# EAGLE board print (EAGLE 5.12), part 1 of 3
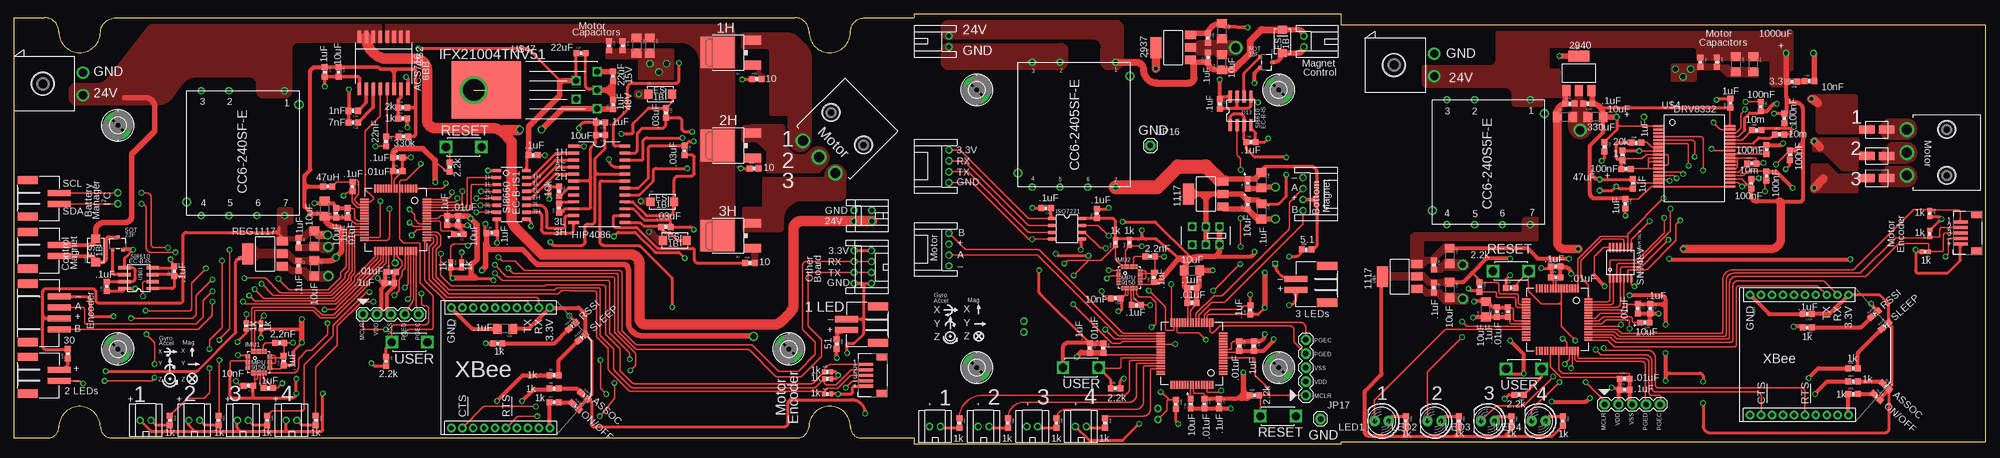
[diagram p0: board, top side]
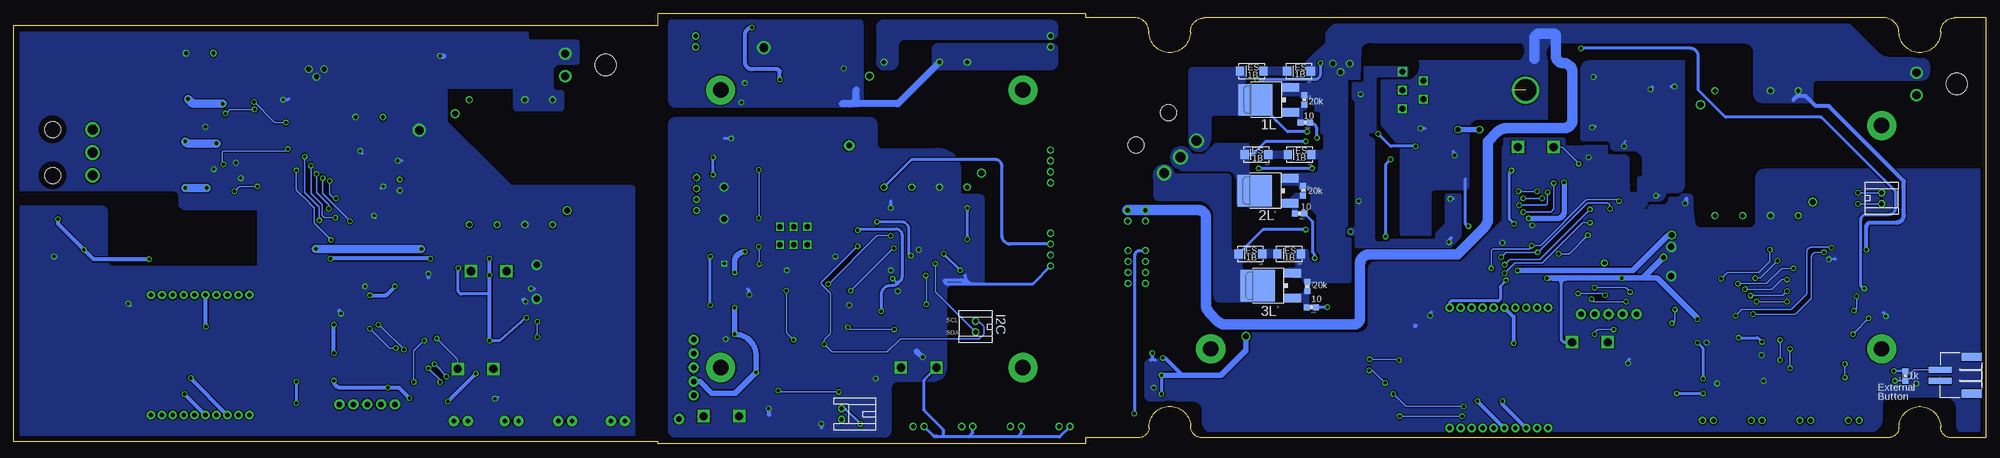
[diagram p1: board, bottom side, seen from below]

Size 360.62 x 78.74 mm. Coordinates in mm from the lower left corner, seen from the top.
Outline: 0,77.97 5.71,77.97 arc-90 8.25,75.43 arc180 15.88,75.43 arc-90 18.8,77.97 142.87,77.97 arc-90 145.42,75.43 arc180 153.04,75.43 arc-90 155.58,77.97 160.78,77.97 164.66,77.97 164.66,78.74 242.76,78.74 242.76,76.58 360.62,76.58 360.62,0.38 242.76,0.38 242.76,0 164.66,0 164.66,1.13 160.78,1.13 154.94,1.13 arc-90 153.04,3.04 arc182 145.42,3.04 arc-90 143.13,1.13 17.91,1.13 arc-90 15.88,3.04 arc180 8.25,3.04 arc-90 6.35,1.13 0,1.13 0,77.97
Copper layers (1*16): Top 0.035mm / dielectric 1.5mm / Bottom 0.035mm
Design rules "default": minimum track width 10mil, minimum drill 24mil, track to track 8mil, track to pad 8mil, pad to pad 8mil, via to via 8mil, smd to smd 8mil, copper to edge 40mil, drill to drill 8mil, minimum pad ring 10mil, minimum via ring 8mil, stop-mask expansion 4mil, vias tented up to drill 0mil, thermal gap 10mil

## Footprints (pad centres in the part's own frame; a part is rotated, then mirrored left to right if it is on the bottom)
DPAK = smd 5.791 x 6.274: D 0,1.587 | smd 1.6 x 3: G -2.286,-4.851; S 2.286,-4.851
JST-2-PH-SMD = smd 1.1 x 4.2: 1 -1,-7.7; 2 1,-7.7 | smd 1.5 x 3.7: P$1 -3.35,-1.95; P$4 3.35,-1.95
0603-POL = smd 1.1 x 1: + 0.85,0; - -0.85,0
0603 = smd 1.1 x 1.1: 1 -0.85,0; 2 0.85,0
1206 = smd 1.6 x 1.8: 1 -1.4,0; 2 1.4,0
SOIC16-W = smd 0.65 x 2.25: 1 -4.445,-4.75; 2 -3.175,-4.75; 3 -1.905,-4.75; 4 -0.635,-4.75; 5 0.635,-4.75; 6 1.905,-4.75; 7 3.175,-4.75; 8 4.445,-4.75; 9 4.445,4.75; 10 3.175,4.75; 11 1.905,4.75; 12 0.635,4.75; 13 -0.635,4.75; 14 -1.905,4.75; 15 -3.175,4.75; 16 -4.445,4.75
SMA-DIODE = smd 1.52 x 1.63: A -2.15,0; C 2.15,0
SOIC8-N = smd 2.2 x 0.6: 1 -2.6,1.905; 2 -2.6,0.635; 3 -2.6,-0.635; 4 -2.6,-1.905; 5 2.6,-1.905; 6 2.6,-0.635; 7 2.6,0.635; 8 2.6,1.905
SOIC-8 = smd 1.5 x 0.55: 1 -2.7,1.905; 2 -2.7,0.635; 3 -2.7,-0.635; 4 -2.7,-1.905; 5 2.7,-1.905; 6 2.7,-0.635; 7 2.7,0.635; 8 2.7,1.905
2,8-PAD = drill 2.8 pad 5.334 round: B2,8 0,0
LGA24_4X4 = smd 0.8 x 0.35: 1 -2,1.25; 2 -2,0.75; 3 -2,0.25; 4 -2,-0.25; 5 -2,-0.75; 6 -2,-1.25; 13 2,-1.25; 14 2,-0.75; 15 2,-0.25; 16 2,0.25; 17 2,0.75; 18 2,1.25 | smd 0.35 x 0.85: 7 -1.25,-1.975; 8 -0.75,-1.975; 9 -0.25,-1.975; 10 0.25,-1.975; 11 0.75,-1.975; 12 1.25,-1.975; 19 1.25,1.975; 20 0.75,1.975; 21 0.25,1.975; 22 -0.25,1.975; 23 -0.75,1.975; 24 -1.25,1.975
JST-4-PH-SMD = smd 1.1 x 4.2: 1 -3,-7.7; 2 -1,-7.7; 3 1,-7.7; 4 3,-7.7 | smd 1.5 x 3.7: P$1 -5.35,-1.95; P$2 5.35,-1.95
JST-5-SH = smd 0.6 x 2.7: 1 2,4; 2 1,4; 3 0,4; 4 -1,4; 5 -2,4 | smd 1.2 x 2: P$6 -3.3,1; P$7 3.3,1
JST-2-PH-TH = drill 0.8 round: 1 -1,-6.35; 2 1,-6.35
1X01_TEST = drill 0.762 round: 1 0,0
JST-2-PH-V = drill 0.8 round: 1 -1,0; 2 1,0
JST-4-PH-TH = drill 0.8 round: 1 -3,-6.35; 2 -1,-6.35; 3 1,-6.35; 4 3,-6.35
JST-4-PH-V = drill 0.8 round: 1 -3,0; 2 -1,0; 3 1,0; 4 3,0
TE-MINIMATENLOK-2 = drill 1.48 round: 1 -2.07,12.67; 2 2.07,12.67 | hole 3.91: 0,5.33
MOLEX-3-MINIFITJR-RA = drill 1.803 round: 1 4.191,13.538; 2 0,13.538; 3 -4.191,13.538 | hole 3: -4.204,6.248; 4.204,6.248
1X01 = drill 1.016 pad 1.88 round: 1 0,0
1X05-PICKIT3 = drill 1.016 pad 1.88 round: MCLR 1.27,-1.016; PGEC 11.43,-1.016; PGED 8.89,-1.016; VDD 3.81,-1.016; VSS 6.35,-1.016
LED5MM = drill 0.813 pad 1.88 round: A -1.27,0; K 1.27,0
SOT23F = smd 0.6 x 0.65: D 0,1.125; G -0.95,-1.125; S 0.95,-1.125
SOIC24-W = smd 0.533 x 1.981: 1 -6.985,-4.686; 2 -5.715,-4.686; 3 -4.445,-4.686; 4 -3.175,-4.686; 5 -1.905,-4.686; 6 -0.635,-4.686; 7 0.635,-4.686; 8 1.905,-4.686; 9 3.175,-4.686; 10 4.445,-4.686; 11 5.715,-4.686; 12 6.985,-4.686; 13 6.985,4.686; 14 5.715,4.686; 15 4.445,4.686; 16 3.175,4.686; 17 1.905,4.686; 18 0.635,4.686; 19 -0.635,4.686; 20 -1.905,4.686; 21 -3.175,4.686; 22 -4.445,4.686; 23 -5.715,4.686; 24 -6.985,4.686
SOT223 = smd 1.499 x 2.007: 1 -2.261,-3.15; 2 0.025,-3.15; 3 2.311,-3.15 | smd 3.81 x 2.007: 4 0,3.15
CC6-2405SF-E = drill 0.8 round: 1 -11.43,7.62; 2 -11.43,-2.54; 3 -11.43,-7.62; 4 11.43,-7.62; 5 11.43,-2.54; 6 11.43,2.54; 7 11.43,7.62 | drill 1.1 round: P$9 8.89,-10.25; P$10 -8.89,10.25
0402 = smd 0.7 x 0.9: 1 -0.65,0; 2 0.65,0
TACTILE_SWITCH = drill 1.5 square: 1 -3.25,0; 2 3.25,0
SLIDE_SWITCH = drill 1 square: 1 -2.489,1.651; 2 0,1.651; 3 2.489,1.651; 4 2.489,-1.651; 5 0,-1.651; 6 -2.489,-1.651
TQFP64_10X10 = smd 1.5 x 0.3: 1 -5.7,3.75; 2 -5.7,3.25; 3 -5.7,2.75; 4 -5.7,2.25; 5 -5.7,1.75; 6 -5.7,1.25; 7 -5.7,0.75; 8 -5.7,0.25; 9 -5.7,-0.25; 10 -5.7,-0.75; 11 -5.7,-1.25; 12 -5.7,-1.75; 13 -5.7,-2.25; 14 -5.7,-2.75; 15 -5.7,-3.25; 16 -5.7,-3.75; 33 5.7,-3.75; 34 5.7,-3.25; 35 5.7,-2.75; 36 5.7,-2.25; 37 5.7,-1.75; 38 5.7,-1.25; 39 5.7,-0.75; 40 5.7,-0.25; 41 5.7,0.25; 42 5.7,0.75; 43 5.7,1.25; 44 5.7,1.75; 45 5.7,2.25; 46 5.7,2.75; 47 5.7,3.25; 48 5.7,3.75 | smd 0.3 x 1.5: 17 -3.75,-5.7; 18 -3.25,-5.7; 19 -2.75,-5.7; 20 -2.25,-5.7; 21 -1.75,-5.7; 22 -1.25,-5.7; 23 -0.75,-5.7; 24 -0.25,-5.7; 25 0.25,-5.7; 26 0.75,-5.7; 27 1.25,-5.7; 28 1.75,-5.7; 29 2.25,-5.7; 30 2.75,-5.7; 31 3.25,-5.7; 32 3.75,-5.7; 49 3.75,5.7; 50 3.25,5.7; 51 2.75,5.7; 52 2.25,5.7; 53 1.75,5.7; 54 1.25,5.7; 55 0.75,5.7; 56 0.25,5.7; 57 -0.25,5.7; 58 -0.75,5.7; 59 -1.25,5.7; 60 -1.75,5.7; 61 -2.25,5.7; 62 -2.75,5.7; 63 -3.25,5.7; 64 -3.75,5.7
36HSSOP = smd 2 x 0.4: 1 -6.5,5.85; 2 -6.5,5.2; 3 -6.5,4.55; 4 -6.5,3.9; 5 -6.5,3.25; 6 -6.5,2.6; 7 -6.5,1.95; 8 -6.5,1.3; 9 -6.5,0.65; 10 -6.5,0; 11 -6.5,-0.65; 12 -6.5,-1.3; 13 -6.5,-1.95; 14 -6.5,-2.6; 15 -6.5,-3.25; 16 -6.5,-3.9; 17 -6.5,-4.55; 18 -6.5,-5.2; 19 6.5,-5.2; 20 6.5,-4.52; 21 6.5,-3.87; 22 6.5,-3.22; 23 6.5,-2.57; 24 6.5,-1.92; 25 6.5,-1.27; 26 6.5,-0.62; 27 6.5,0.03; 28 6.5,0.68; 29 6.5,1.33; 30 6.5,1.98; 31 6.5,2.63; 32 6.5,3.28; 33 6.5,3.93; 34 6.5,4.58; 35 6.5,5.23; 36 6.5,5.85
2-SMD(J-LEAD) = smd 2.77 x 1.47: P$1 -1.79,0; P$2 1.79,0
RADIAL-10 = drill 0.7 round: P$1 0,2.5; P$2 0,-2.5
RADIAL-5 = drill 0.6 round: P$1 0,1; P$2 0,-1
14TSSOP = smd 1.6 x 0.35: 1 -2.8,1.95; 2 -2.8,1.3; 3 -2.8,0.65; 4 -2.8,0; 5 -2.8,-0.65; 6 -2.8,-1.3; 7 -2.8,-1.95; 8 2.8,-1.95; 9 2.8,-1.3; 10 2.8,-0.65; 11 2.8,0; 12 2.8,0.65; 13 2.8,1.3; 14 2.8,1.95
SOIC16-N = smd 0.6 x 1.55: 1 -4.445,-2.7; 2 -3.175,-2.7; 3 -1.905,-2.7; 4 -0.635,-2.7; 5 0.635,-2.7; 6 1.905,-2.7; 7 3.175,-2.7; 8 4.445,-2.7; 9 4.445,2.7; 10 3.175,2.7; 11 1.905,2.7; 12 0.635,2.7; 13 -0.635,2.7; 14 -1.905,2.7; 15 -3.175,2.7; 16 -4.445,2.7
TO220-5 = drill 1.1 square: 1 3.81,-3.404; 2 0,-1.702; 3 3.81,0; 4 0,1.702; 5 3.81,3.404 | smd 12.7 x 10.541: PAD -16.434,0 | drill 3.937 round: PAD2 -18.72,0
XBEE-SILK = drill 0.8 pad 1.524 round: 1 -11,20; 2 -11,18; 3 -11,16; 4 -11,14; 5 -11,12; 6 -11,10; 7 -11,8; 8 -11,6; 9 -11,4; 10 -11,2; 11 11,2; 12 11,4; 13 11,6; 14 11,8; 15 11,10; 16 11,12; 17 11,14; 18 11,16; 19 11,18; 20 11,20
0603-DIODE = smd 1.1 x 1.1: AN -0.85,0; CAT 0.85,0

## Placement (x,y rotation side)
1H  IRLR024  [DPAK]  130.3,71.62 90 top
1L  IRLR024  [DPAK]  131.95,62.98 90 bottom
2H  IRLR024  [DPAK]  130.3,54.6 90 top
2L  IRLR024  [DPAK]  132.08,46.34 90 bottom
3H  IRLR024  [DPAK]  130.3,38.09 90 top
3L  IRLR024  [DPAK]  131.57,28.94 90 bottom
BUTTON  [JST-2-PH-SMD]  0.64,12.56 270 bottom
C1  10uF  [0603-POL]  81.41,38.34 180 top
C2  .1uF  [0603]  61.98,47.1 270 top
C3  .1uF  [0603]  52.07,32.63 270 top
C4  10uF  [1206]  54.99,32.12 270 top
C5  10uF  [1206]  54.99,37.58 270 top
C6  .1uF  [0603]  52.07,36.82 270 top
C7  .01uF  [0603]  69.09,31.48 0 top
C8  .01uF  [0603]  61.09,42.28 90 top
C9  .01uF  [0603]  81.28,40.88 270 top
C10  .01uF  [0603]  70.23,49.9 0 top
C11  .1uF  [0603]  70.23,52.44 0 top
C12  .1uF  [0603]  79.25,40.88 270 top
C13  .1uF  [0603]  58.93,42.28 90 top
C14  .1uF  [0603]  68.73,29.45 0 top
C15  10uF  [1206]  56.9,43.04 90 top
C16  .1uF  [0603]  49.4,15.23 90 top
C17  2.2nF  [0603]  48.64,18.53 0 top
C18  10nF  [0603]  42.94,10.66 180 top
C19  .1uF  [0603]  46.57,10.24 0 top
C20  .1uF  [1206]  89.87,21.07 180 top
C21  1nF  [0603]  62.1,60.95 180 top
C22  7nF  [0603]  62.1,58.79 180 top
C23  22nF  [0603]  68.07,55.36 270 top
C24  .1uF  [0603]  56.9,68.06 270 top
C25  10uF  [0603]  59.44,68.06 270 top
C26  .1uF 48V  [0603]  109.6,62.09 90 top
C27  22uF  [0603]  103.76,71.49 0 top
C28  22uF 15V  [0603]  109.6,67.3 270 top
C29  .1uF  [0603]  95,52.82 0 top
C30  .1uF  [0603]  87.38,38.6 0 top
C31  DNI  [0603]  99.69,43.17 90 top
C32  .03uF 15V  [0603]  119.25,60.57 270 top
C33  .03uF 15V  [0603]  122.68,53.71 270 top
C34  .03uF 15V  [0603]  119.25,39.74 180 top
C35  .1uF  [0603]  107.31,58.79 180 top
C36  10uF  [0603]  107.31,56.5 180 top
C37  .1uF  [0603]  29.34,31.61 90 top
C38  .1uF  [0603]  17.02,28.82 90 top
C39  .01uF  [0603]  108.84,72.89 270 top
C40  .1uF  [0603]  111.38,72.89 270 top
C41  1uF  [1206]  113.92,72.89 270 top
C42  10uF  [1206]  116.33,72.89 270 top
C43  .1uF  [0603]  226.76,17.91 270 top
C44  10uF  [0603-POL]  215.2,7.37 90 top
C45  .1uF  [1206]  228.16,48.26 270 top
C46  10uF  [0603-POL]  225.62,47.62 90 top
C47  10uF  [0603-POL]  225.62,43.81 90 top
C48  .1uF  [1206]  228.16,42.55 270 top
C49  .1uF  [0603]  226.12,24.51 90 top
C50  .1uF  [0603]  220.41,7.37 270 top
C51  .1uF  [0603]  196.79,17.53 270 top
C52  .1uF  [0603]  215.46,28.58 0 top
C53  .01uF  [0603]  215.44,25.84 0 top
C54  .01uF  [0603]  224.09,17.91 270 top
C55  .01uF  [0603]  217.74,7.37 270 top
C56  .01uF  [0603]  199.25,17.53 270 top
C57  10uF  [1206]  215.46,31.75 0 top
C58  10nF  [0603]  201.49,26.67 180 top
C59  .1uF  [0603]  205.3,25.4 0 top
C60  .1uF  [0603]  208.47,30.48 90 top
C61  2.2nF  [0603]  207.84,34.29 0 top
C62  .1uF 24V  [0603]  218.38,70.74 90 top
C63  .1uF 24V  [0603]  218.38,74.3 270 top
C64  10uF 24V  [1206]  220.92,69.85 90 top
C65  10uF 24V  [1206]  220.92,75.57 270 top
C66  .1uF  [0603]  226.25,55.24 0 top
C67  .1uF  [0603]  220.54,62.23 270 top
C68  .1uF  [0603]  188.79,43.18 180 top
C69  .1uF  [0603]  198.06,42.16 90 top
C70  10uF  [0603-POL]  298.26,22.23 180 top
C71  .01uF  [0603]  273.24,24.13 90 top
C72  .1uF  [0603]  294.58,9.91 0 top
C73  .1uF  [0603]  281.98,32.49 0 top
C74  .01uF  [0603]  281.98,30.45 0 top
C75  .1uF  [0603]  299.28,24.77 270 top
C76  .01uF  [0603]  296.99,24.77 270 top
C77  .01uF  [0603]  294.58,11.94 0 top
C78  10uF  [1206]  269.18,24.64 90 top
C79  1uF  [0603]  296.1,47.62 270 top
C80  1uF  [0603]  294.7,43.94 270 top
C81  1uF  [0603]  290.89,54.36 270 top
C82  1uF  [0603]  313.88,62.36 90 top
C83  100nF 24V  [0603]  317.69,47.62 90 top
C84  10nF 24V  [0603]  328.36,66.42 0 top
C85  100nF 24V  [0603]  324.8,52.83 270 top
C86  100nF 24V  [0603]  319.47,61.72 270 top
C87  100nF 24V  [0603]  320.48,53.85 90 top
C88  100nF 24V  [0603]  320.48,49.02 90 top
C89  100nF  [0603]  294.83,50.29 0 top
C90  100nF 24V  [0603]  323.79,59.56 270 top
C91  .01uF  [0603]  308.42,69.85 270 top
C92  .1uF  [0603]  311.47,69.85 270 top
C93  1uF  [1206]  314.9,69.47 270 top
C94  10uF  [1206]  318.07,69.47 270 top
C95  10uF  [1206]  262.57,34.42 270 top
C96  .1uF  [0603]  259.65,32.77 270 top
C97  .1uF  [0603]  259.65,28.58 270 top
C98  10uF  [1206]  262.57,28.19 270 top
C99  10uF 24V  [1206]  283.65,59.82 0 top
C100  .1uF 24V  [0603]  284.54,62.23 0 top
C101  .1uF 24V  [0603]  287.85,62.23 180 top
C102  10uF 24V  [1206]  289.24,59.82 180 top
C103  .1uF  [0603]  327.98,23.75 180 top
C104  .1uF  [0603]  271.21,24.13 90 top
C105  .1uF  [0603]  268.03,28.7 270 top
CS2  ACS716KLATR-6BB-T  [SOIC16-W]  67.67,69.71 180 top
D1  ES1B  [SMA-DIODE]  120.9,37.2 0 top
D2  ES1B  [SMA-DIODE]  118.62,44.31 0 top
D3  ES1B  [SMA-DIODE]  118.24,64 0 top
D4  ES1B  [SMA-DIODE]  134.24,68.19 180 bottom
D5  ES1B  [SMA-DIODE]  125.6,68.19 180 bottom
D6  ES1B  [SMA-DIODE]  134.49,34.79 180 bottom
D7  ES1B  [SMA-DIODE]  127.38,34.79 180 bottom
D8  ES1B  [SMA-DIODE]  133.35,52.95 180 bottom
D9  ES1B  [SMA-DIODE]  125.48,52.95 180 bottom
D10  ES1B  [SMA-DIODE]  14.99,35.42 90 top
D11  ES1B  [SMA-DIODE]  231.97,73.66 90 top
D13  DIGITAL-ISOLATOR-1CHSOIC8-N  [SOIC8-N]  224.35,60.96 90 top
D15  ISO7221SMD  [SOIC-8]  192.6,39.37 0 top
H1  MOUNT-PAD-ROUND2.8  [2,8-PAD]  19.05,58.28 0 top
H2  MOUNT-PAD-ROUND2.8  [2,8-PAD]  19.05,17.39 0 top
H3  MOUNT-PAD-ROUND2.8  [2,8-PAD]  141.73,17.39 0 top
H4  MOUNT-PAD-ROUND2.8  [2,8-PAD]  176.09,64.77 0 top
H5  MOUNT-PAD-ROUND2.8  [2,8-PAD]  231.33,64.77 0 top
H6  MOUNT-PAD-ROUND2.8  [2,8-PAD]  176.09,13.97 0 top
H7  MOUNT-PAD-ROUND2.8  [2,8-PAD]  231.33,13.97 0 top
IMU1  MPU-9150  [LGA24_4X4]  44.83,14.97 0 top
IMU2  MPU-9150  [LGA24_4X4]  204.03,30.48 0 top
J2  [JST-4-PH-SMD]  0.64,23.99 90 top
J5  [JST-5-SH]  159.77,12.56 90 top
J7  [JST-2-PH-TH]  160.02,41.77 270 top
JP1  M01TEST  [1X01_TEST]  69.72,33.13 0 top
JP2  [JST-2-PH-SMD]  0.64,44.95 90 top
JP3  [JST-2-PH-V]  19.05,44.95 90 bottom
JP4  [JST-4-PH-TH]  160.02,32.37 270 top
JP5  [JST-4-PH-V]  156.85,32.37 270 top
JP6  [JST-2-PH-V]  24.13,4.31 180 top
JP7  [JST-2-PH-V]  33.02,4.31 180 top
JP8  [JST-2-PH-V]  41.91,4.31 180 top
JP9  [JST-2-PH-V]  50.8,4.31 180 top
JP10  [TE-MINIMATENLOK-2]  0,65.9 270 top
JP11  [JST-2-PH-SMD]  160.02,21.83 270 top
JP12  [JST-2-PH-V]  156.92,41.77 270 top
JP13  [JST-2-PH-SMD]  0.64,12.56 90 top
JP14  [JST-2-PH-SMD]  0.64,35.42 90 top
JP15  [MOLEX-3-MINIFITJR-RA]  156.85,62.09 135 top
JP16  M01PTH  [1X01]  207.84,54.61 0 top
JP17  M01PTH  [1X01]  238.95,4.57 0 top
JP18  [JST-2-PH-SMD]  242.13,29.21 270 top
JP19  [JST-2-PH-V]  177.36,3.17 180 top
JP20  [JST-2-PH-V]  186.25,3.17 180 top
JP21  [JST-2-PH-V]  168.47,3.17 180 top
JP22  [JST-2-PH-V]  195.14,3.17 180 top
JP23  [JST-2-PH-V]  184.72,21.46 270 bottom
JP24  [JST-4-PH-TH]  164.66,35.56 90 top
JP25  [JST-4-PH-TH]  242.13,45.72 270 top
JP26  [JST-2-PH-TH]  242.25,73.66 270 top
JP27  [JST-4-PH-TH]  164.66,50.8 90 top
JP28  [JST-2-PH-TH]  164.66,73.66 90 top
JP29  [JST-2-PH-TH]  202.88,5.46 270 bottom
JP30  [1X05-PICKIT3]  289.62,8.25 0 top
JP31  [MOLEX-3-MINIFITJR-RA]  359.73,53.34 90 top
JP32  [TE-MINIMATENLOK-2]  247.08,69.34 270 top
JP33  [JST-5-SH]  359.98,38.61 90 top
L1  47uH  [0603]  57.4,47.1 0 top
LED1  [LED5MM]  250.13,4.19 180 top
LED2  [LED5MM]  259.78,4.19 180 top
LED3  [LED5MM]  269.56,4.19 180 top
LED4  [LED5MM]  278.83,4.19 180 top
M1  N-MOSSOT23F  [SOT23F]  19.05,36.69 0 top
M2  N-MOSSOT23F  [SOT23F]  229.04,69.85 270 top
MD1  HIP4086  [SOIC24-W]  107.06,47.49 270 top
P1  LINEAR-REG1117  [SOT223]  45.97,34.79 90 top
P2  DC-DC-CONVERTER1.2A  [CC6-2405SF-E]  41.91,53.2 270 top
P3  DC-DC-CONVERTER1.2A  [CC6-2405SF-E]  193.87,58.42 270 top
P4  LINEAR-REG1117  [SOT223]  218,45.72 90 top
P5  LINEAR-REGLM2937  [SOT223]  212.03,72.52 90 top
PROG  [1X05-PICKIT3]  62.61,24.75 0 top
PROG_1  [1X05-PICKIT3]  235.27,7.62 90 top
R1  1k  [0603]  14.73,12.43 90 bottom
R2  2.2k  [0603]  79.76,50.66 90 top
R3  2.2k  [0603]  68.11,15.13 270 top
R4  10k  [0402]  42.55,21.58 270 top
R5  10k  [0402]  45.21,21.58 270 top
R6  1k  [0603]  88.48,18.4 180 top
R7  1k  [0603]  98.81,7.61 0 top
R8  1k  [0603]  98.81,10.15 0 top
R9  1k  [0603]  98.82,12.57 0 top
R10  2k  [0603]  71.12,61.58 0 top
R11  1k  [0603]  71.12,59.55 0 top
R12  330k  [0603]  71.25,56.25 0 top
R13  1k  [0402]  148.84,9.13 0 top
R14  1k  [0402]  148.84,11.93 0 top
R15  1k  [0402]  148.84,13.2 0 top
R16  1k  [0402]  79.88,32.75 270 top
R17  1k  [0402]  81.92,32.75 270 top
R18  1k  [0603]  28.57,4.31 270 top
R19  1k  [0603]  37.47,4.31 270 top
R20  1k  [0603]  46.35,4.31 270 top
R21  1k  [0603]  55.24,4.31 270 top
R22  51  [0603]  150.5,18.28 270 top
R23  30  [0603]  9.91,16.5 90 top
R24  10k  [0603]  99.69,46.22 270 top
R25  10  [0603]  135.89,66.79 0 top
R26  10  [0603]  124.46,58.79 180 bottom
R27  10  [0603]  125.48,42.15 180 bottom
R28  10  [0603]  123.32,25.01 180 bottom
R29  10  [0603]  135.38,50.41 0 top
R30  10  [0603]  134.62,33.13 0 top
R31  20k  [0603]  124.59,62.98 270 bottom
R32  20k  [0603]  124.84,46.34 270 bottom
R33  20k  [0603]  124.08,28.82 270 bottom
R34  2.2k  [0603]  226.89,8.89 0 top
R35  2.2k  [0603]  201.49,10.16 0 top
R36  5.1  [0603]  236.41,35.56 0 top
R37  1k  [0603]  172.91,3.81 270 top
R38  1k  [0603]  181.8,3.81 270 top
R39  1k  [0603]  190.69,3.81 270 top
R40  1k  [0603]  199.58,3.81 270 top
R41  10k  [0402]  201.49,36.83 90 top
R42  10k  [0402]  204.03,36.83 90 top
R43  10k  [0603]  212.53,7.24 270 top
R44  2.2k  [0603]  275.27,9.02 180 top
R45  2.2k  [0603]  273.75,28.58 0 top
R46  3.3  [0603]  325.18,66.29 180 top
R47  1  [0603]  294.2,52.83 90 top
R48  20k  [0603]  296.74,55.12 0 top
R49  10 mOhm  [0603]  318.71,57.4 0 top
R50  10mOhm  [0603]  322.9,56.64 0 top
R51  10mOhm  [0603]  317.82,51.31 0 top
R52  1k  [0603]  327.98,21.34 180 top
R53  1k  [0603]  336.36,9.14 0 top
R54  1k  [0603]  336.36,11.43 0 top
R55  1k  [0603]  336.36,13.84 0 top
R56  1k  [0402]  349.57,35.18 180 top
R57  1k  [0402]  350.33,38.48 90 top
R58  1k  [0402]  350.33,42.16 270 top
R59  1k  [0603]  254.57,4.19 270 top
R60  1k  [0603]  264.22,4.19 270 top
R61  1k  [0603]  273.88,4.19 270 top
R62  1k  [0603]  283.27,4.19 270 top
RESET  TACTILE_SWITCH  [TACTILE_SWITCH]  273.75,31.62 180 top
RESET1  TACTILE_SWITCH  [TACTILE_SWITCH]  82.3,54.34 0 top
RESET2  TACTILE_SWITCH  [TACTILE_SWITCH]  231.2,5.08 0 top
SW1  SLIDE_SWTHROUGHHOLE  [SLIDE_SWITCH]  218,38.1 180 top
U$1  DSPIC33EP512MC806  [TQFP64_10X10]  69.85,41.01 270 top
U$2  DSPIC33EP512MC806  [TQFP64_10X10]  215.46,16.51 180 top
U$3  DSPIC33EP512MC806  [TQFP64_10X10]  282.26,22.73 270 top
U$4  DRV833236HSSOP  [36HSSOP]  307.28,52.32 0 top
U$5  LINEAR-REG1117  [SOT223]  253.43,30.61 90 top
U$6  LINEAR-REGLM2940  [SOT223]  286.19,67.82 0 top
U$8  DC-DC-CONVERTER1.2A  [CC6-2405SF-E]  269.68,51.56 270 top
U$10  35F0121-0SR-10  [2-SMD(J-LEAD)]  340.68,57.53 0 top
U$11  35F0121-0SR-10  [2-SMD(J-LEAD)]  340.68,52.7 0 top
U$12  35F0121-0SR-10  [2-SMD(J-LEAD)]  340.68,48.64 0 top
U$13  1000uF  [RADIAL-10]  326.58,71.5 270 top
U$14  330uF  [RADIAL-10]  295.59,59.82 270 top
U$15  47uF  [RADIAL-5]  290,47.37 180 top
U$34  SN74LV32APWR74LV  [14TSSOP]  293.81,33.15 90 top
U$46  DIGITAL-ISOLATOR-6CHSI8660EC-B-IS1  [SOIC16-N]  91.06,45.58 270 top
U$47  IFX21004TNV51  [TO220-5]  102.87,64.76 0 top
U$61  DIGITAL-ISOLATOR-1CHSOIC8-N  [SOIC8-N]  22.86,30.34 180 top
USER  TACTILE_SWITCH  [TACTILE_SWITCH]  195.14,13.97 0 top
USER1  TACTILE_SWITCH  [TACTILE_SWITCH]  72.39,18.61 180 top
USER2  TACTILE_SWITCH  [TACTILE_SWITCH]  276.16,13.72 0 top
XBEE  XBEETH  [XBEE-SILK]  78.03,13.91 270 top
XBEE1  XBEETH  [XBEE-SILK]  315.53,16.26 270 top
XLED1  [0603-DIODE]  102.73,6.9 318 top
XLED2  [0603-DIODE]  103.89,19.47 42 top
XLED3  [0603-DIODE]  104.32,8.81 318 top
XLED4  [0603-DIODE]  102.13,21.6 42 top
XLED5  [0603-DIODE]  340.68,8.64 318 top
XLED6  [0603-DIODE]  342.33,10.54 318 top
XLED7  [0603-DIODE]  342.2,21.59 42 top
XLED8  [0603-DIODE]  340.3,23.75 42 top

## Library data of the parts
1H 1L 2H 2L 3H 3L BUTTON C1-C105 CS2 D1-D11 D13 H1-H7 IMU1 IMU2 J2 J5 J7 JP1-JP33 L1 LED1-LED4 M1 M2 MD1 P1-P5 PROG PROG_1 R1-R62 RESET RESET1 RESET2 SW1 U$1-U$3 U$5 U$6 U$8 U$46 U$47 U$61 USER USER1 USER2 XBEE XBEE1 XLED1-XLED8 = GibbotV5
D15 = GibbotV6
U$4 U$10-U$15 U$34 = motordriver

## Nets
1HO: 1H.G R25.2
1HS: 1H.S 1L.D C32.2 D4.C JP15.1 MD1.23
1LO: 1L.G R26.2 R31.2
2HO: 2H.G R29.2
2HS: 2H.S 2L.D C33.1 D8.C JP15.2 MD1.18
2LO: 2L.G R27.2 R32.2
3.3V: C3.1 C4.1 C7.1 C8.1 C9.1 C10.1 C11.1 C12.1 C13.1 C14.1 C15.1 C16.1 C18.1 C20.1 C24.1 C25.1 CS2.14 IMU1.3 IMU1.8 IMU1.9 IMU1.13 JP4.1 JP5.1 JP6.2 JP7.2 JP8.2 JP9.2 L1.1 P1.2 P1.4 PROG.VDD R1.2 R2.1 R4.2 R5.2 R10.2 R12.2 R16.2 R17.2 U$1.10 U$1.26 U$1.38 U$1.57 USER1.1 XBEE.1 XLED1.CAT XLED2.CAT XLED3.CAT
3.3V1: C43.1 C49.1 C50.1 C51.1 C52.1 C53.1 C54.1 C55.1 C56.1 C57.1 C58.1 C60.1 C69.1 D15.8 IMU2.3 IMU2.8 IMU2.9 IMU2.13 JP19.2 JP20.2 JP21.2 JP22.2 JP29.1 PROG_1.VDD R34.1 R41.2 R42.2 SW1.1 SW1.6 U$2.10 U$2.19 U$2.26 U$2.38 U$2.57 USER.1
3.3V2: C71.1 C72.1 C73.1 C74.1 C75.1 C76.1 C77.1 C78.1 C97.1 C98.1 C103.1 C104.1 C105.1 JP30.VDD R45.1 R59.2 R60.2 R61.2 R62.2 U$3.10 U$3.19 U$3.26 U$3.38 U$3.57 U$5.2 U$5.4 U$34.14 USER2.1 XBEE1.1 XLED5.CAT XLED6.CAT XLED7.CAT
3HO: 3H.G R30.2
3HS: 3H.S 3L.D C34.1 D6.C JP15.3 MD1.15
3LO: 3L.G R28.2 R33.2
5V: C45.1 C46.+ JP24.3 JP25.3 P3.7 P4.3 R36.2
5V1: C27.1 C29.1 C38.1 U$46.16 U$47.4 U$61.8
5V2: C5.1 C6.1 C30.1 C37.1 J2.2 J5.5 P1.3 P2.7 R13.2 R14.2 R15.2 R22.2 R23.2 U$46.1 U$61.1 U$61.3
5V3: C95.1 C96.1 JP33.5 R56.2 R57.2 R58.2 U$5.3 U$8.7
12V: C79.1 C80.1 C81.1 C82.1 C101.1 C102.1 U$4.1 U$4.17 U$4.18 U$4.19 U$4.36 U$6.3 U$14.P$2 U$15.P$2
15V: C28.1 C35.1 C36.1 D1.A D2.A D3.A MD1.20 R24.1 U$47.5
24V: C26.1 CS2.5 CS2.6 CS2.7 CS2.8 D10.C J7.2 JP10.2 JP12.2 JP14.2 P2.1 U$47.1
24V1: C62.1 C64.1 D11.C JP26.1 JP28.2 P3.1 P5.1
24V2: C83.1 C85.1 C90.1 C91.1 C92.1 C93.1 C94.1 C99.1 C100.1 JP32.2 R46.2 U$4.21 U$4.29 U$4.34 U$6.1 U$8.1 U$13.P$2
CTS: U$1.54 XBEE.12
CTS1: U$3.54 XBEE1.12
FAULT: U$1.16
GND: C70.- C71.2 C72.2 C73.2 C74.2 C75.2 C76.2 C77.2 C78.2 C79.2 C80.2 C81.2 C82.2 C83.2 C84.2 C85.2 C90.2 C91.2 C92.2 C93.2 C94.2 C95.2 C96.2 C97.2 C98.2 C99.2 C100.2 C101.2 C102.2 C103.2 C104.2 C105.2 JP30.VSS JP32.1 JP33.4 R44.2 R47.2 R49.2 R50.2 R51.2 RESET.2 U$3.9 U$3.20 U$3.25 U$3.41 U$4.8 U$4.24 U$4.25 U$4.26 U$4.27 U$5.1 U$6.2 U$6.4 U$8.2 U$8.3 U$8.5 U$13.P$1 U$14.P$1 U$15.P$1 U$34.7 XBEE1.10 XLED8.CAT
GND1: 1L.S 2L.S 3L.S C26.2 C27.2 C28.2 C29.2 C31.1 C35.2 C36.2 C38.2 C39.2 C40.2 C41.2 C42.2 D5.A D7.A D9.A J7.1 JP10.1 JP12.1 M1.S MD1.6 MD1.10 P2.2 P2.3 R31.1 R32.1 R33.1 U$46.9 U$47.3 U$47.PAD U$47.PAD2 U$61.5 U$61.7
GND2: BUTTON.2 C1.- C2.2 C3.2 C4.2 C5.2 C6.2 C7.2 C8.2 C9.2 C10.2 C11.2 C12.2 C13.2 C14.2 C15.2 C16.2 C17.2 C18.2 C19.2 C20.2 C21.2 C22.2 C23.2 C24.2 C25.2 C30.2 C37.2 CS2.9 CS2.16 IMU1.1 IMU1.11 IMU1.15 IMU1.17 IMU1.18 J2.4 J5.4 JP4.4 JP5.4 JP11.1 JP13.1 P1.1 P2.5 PROG.VSS R3.2 R11.2 RESET1.2 U$1.9 U$1.20 U$1.25 U$1.41 U$46.8 U$61.4 XBEE.10 XLED4.CAT
GND3: C43.2 C44.- C45.2 C46.- C47.- C48.2 C49.2 C50.2 C51.2 C52.2 C53.2 C54.2 C55.2 C56.2 C57.2 C58.2 C59.2 C60.2 C61.2 C66.2 C69.2 D13.4 D15.5 IMU2.1 IMU2.11 IMU2.15 IMU2.17 IMU2.18 JP16.1 JP17.1 JP18.1 JP24.1 JP25.1 P3.5 P4.1 PROG_1.VSS R35.2 R43.2 RESET2.2 U$2.9 U$2.20 U$2.25 U$2.41
GND4: C62.2 C63.2 C64.2 C65.2 C67.2 D13.5 D13.7 JP28.1 M2.S P3.2 P3.3 P5.2 P5.4
HALL1: J5.1 R15.1 U$1.53
HALL2: J5.2 R14.1 U$1.52
HALL3: J5.3 R13.1 U$1.51
HALL4: JP33.1 R58.1 U$3.53
HALL5: JP33.2 R57.1 U$3.52
HALL6: JP33.3 R56.1 U$3.51
I_SENSE: CS2.12 U$1.18
IMU_INT1: IMU1.12 U$1.35
IMU_INT2: IMU2.12 U$2.35
LED1: R18.1 U$1.28
LED2: R19.1 U$1.27
LED3: R20.1 U$1.45
LED4: R21.1 U$1.46
LED5: R40.1 U$2.46
LED6: R39.1 U$2.45
LED7: R38.1 U$2.44
LED8: R37.1 U$2.43
LED9: LED4.K U$3.46
LED10: LED3.K U$3.45
LED11: LED2.K U$3.27
LED12: LED1.K U$3.28
LOW_MAG: D13.2 U$2.30
LOW_MAGA: JP25.2 U$2.23
LOW_MAGB: JP25.4 U$2.22
M2: C89.1 R47.1 R48.1 U$4.9 U$4.12
MCLR1: PROG.MCLR R2.2 RESET1.1 U$1.7
MCLR2: JP30.MCLR R45.2 RESET.1 U$3.7
MCLR_2: PROG_1.MCLR R34.2 RESET2.1 U$2.7
MOT_TEMP: JP29.2 R43.1 U$2.62
MOTA: JP24.2 U$2.34
MOTB: JP24.4 U$2.33
MOTOR+: 1H.D 2H.D 3H.D C39.1 C40.1 C41.1 C42.1 CS2.1 CS2.2 CS2.3 CS2.4
N$1: C47.+ C48.1 P4.2 SW1.2 SW1.5
N$2: C44.+ U$2.56
N$3: JP18.2 R36.1
N$4: C1.+ U$1.56
N$5: P4.4
N$6: C2.1 L1.2 U$1.19
N$7: JP22.1 R40.2
N$8: BUTTON.1 R1.1 U$1.30
N$9: JP1.1 U$1.40
N$10: JP20.1 R39.2
N$11: JP19.1 R38.2
N$12: JP21.1 R37.2
N$13: C59.1 IMU2.10
N$14: C61.1 IMU2.20
N$15: C63.1 C65.1 C67.1 D13.8 P5.3
N$16: C17.1 IMU1.20
N$17: D13.6 M2.G
N$18: C19.1 IMU1.10
N$19: R6.2 XBEE.6
N$20: R6.1 XLED4.AN
N$21: R7.1 XBEE.20
N$22: R7.2 XLED1.AN
N$23: R8.2 XLED3.AN
N$24: R9.2 XLED2.AN
N$25: R8.1 XBEE.15
N$26: R9.1 XBEE.13
N$27: D11.A JP26.2 M2.D
N$28: CS2.15 R10.1 R11.1
N$29: C21.1 CS2.10
N$30: C23.1 CS2.13 R12.1
N$31: C22.1 CS2.11
N$32: JP6.1 R18.2
N$33: C68.1 D15.1 JP27.4
N$34: JP7.1 R19.2
N$35: JP8.1 R20.2
N$36: JP9.1 R21.2
N$37: D15.2 JP27.3
N$38: MD1.24 R25.1
N$39: MD1.22 R26.1
N$40: MD1.21 R27.1
N$41: MD1.19 R28.1
N$42: MD1.17 R29.1
N$43: JP11.2 R22.1
N$44: JP13.2 R23.1
N$45: MD1.14 R30.1
N$46: D15.3 JP27.2
N$47: C31.2 MD1.9
N$48: MD1.7 R24.2
N$49: D4.A D5.C
N$50: D6.A D7.C
N$51: D8.A D9.C
N$52: C32.1 D3.C MD1.1
N$53: C68.2 D15.4 JP27.1
N$54: C70.+ U$3.56
N$55: C34.2 D1.C MD1.13
N$56: C33.2 D2.C MD1.16
N$57: M1.G U$61.6
N$58: D10.A JP14.1 M1.D
N$59: C84.1 R46.1
N$60: C86.1 U$4.35
N$61: C87.2 U$4.30 U$11.P$1
N$62: C87.1 U$4.28
N$63: C88.2 U$4.22 U$12.P$1
N$64: C88.1 U$4.20
N$65: R48.2 U$4.7
N$66: R49.1 U$4.32
N$67: R50.1 U$4.31
N$68: R51.1 U$4.23
N$69: C86.2 U$4.33 U$10.P$1
N$70: R52.1 XLED8.AN
N$71: R53.2 XLED5.AN
N$72: R54.2 XLED6.AN
N$73: R55.2 XLED7.AN
N$74: R52.2 XBEE1.6
N$75: R53.1 XBEE1.20
N$76: R54.1 XBEE1.15
N$77: R55.1 XBEE1.13
N$78: LED1.A R59.1
N$79: LED2.A R60.1
N$80: LED3.A R61.1
N$81: LED4.A R62.1
OUT_A: JP31.1 U$10.P$2
OUT_B: JP31.2 U$11.P$2
OUT_C: JP31.3 U$12.P$2
PGEC1: JP30.PGEC U$3.48
PGEC1_2: PROG_1.PGEC U$2.17
PGEC2: PROG.PGEC U$1.48
PGED1: JP30.PGED U$3.47
PGED1_2: PROG_1.PGED U$2.18
PGED2: PROG.PGED U$1.47
PRE3.3: C66.1 D13.1 D13.3
PWM1H: U$1.61 U$46.2
PWM1H1: U$3.61 U$4.4 U$34.4
PWM1HO: MD1.2 U$46.15
PWM1L: U$1.60 U$46.3
PWM1L1: U$3.60 U$34.5
PWM1LO: MD1.3 U$46.14
PWM2H: U$1.63 U$46.5
PWM2H1: U$3.63 U$4.6 U$34.1
PWM2HO: MD1.5 U$46.12
PWM2L: U$1.62 U$46.4
PWM2L1: U$3.62 U$34.2
PWM2LO: MD1.4 U$46.13
PWM3H: U$1.1 U$46.7
PWM3H1: U$3.1 U$4.16 U$34.9
PWM3HO: MD1.12 U$46.10
PWM3L: U$1.64 U$46.6
PWM3L1: U$3.64 U$34.10
PWM3LO: MD1.11 U$46.11
RES_A: U$4.5 U$34.6
RES_B: U$4.14 U$34.3
RES_C: U$4.15 U$34.8
RTS: U$1.55 XBEE.16
RTS1: U$3.55 XBEE1.16
RX: U$3.50 XBEE1.2
RX1: U$1.50 XBEE.2
RX2: JP4.2 JP5.2 R17.1 U$1.32
RX3: D15.6 U$2.31
SCL1: IMU1.23 JP2.2 JP3.2 R5.1 U$1.37
SCL2: IMU2.23 JP23.1 R42.1 U$2.37
SDA1: IMU1.24 JP2.1 JP3.1 R4.1 U$1.36
SDA2: IMU2.24 JP23.2 R41.1 U$2.36
TOPMAGA: J2.3 U$1.33
TOPMAGB: J2.1 U$1.34
TOPMAGCON: U$1.29 U$61.2
TX: U$3.49 XBEE1.3
TX1: U$1.49 XBEE.3
TX2: JP4.3 JP5.3 R16.1 U$1.31
TX3: D15.7 U$2.32
USER: R3.1 U$1.44 USER1.2
USER1: R35.1 U$2.42 USER.2
USER2: R44.1 U$3.44 USER2.2
VREG: C89.2 U$4.10 U$4.11 U$4.13

## Tracks (layer width: path | path; a pad name or v marks a point on that pad's centre or on a via)
1HO
  pour Top (no thermals): 136.14,69.58 135.64,69.58 arc90 135.26,69.2
  pour Top (no thermals): 133.99,70.09 136.27,70.09 arc-90 136.53,69.84 136.53,68.06 arc90 137.03,67.55 137.16,67.55 arc-90 137.29,67.42 137.29,66.54 arc-90 137.16,66.41 136.53,66.41 arc-90 136.27,66.66 136.27,67.3 136.11,67.46 arc-45 136.02,67.68 136.02,68.57 134.24,68.57 arc-90 133.86,68.95
1HS  (via drill 0.6)
  Top 0.508: MD1.23 113.41,53.2 arc90 114.05,53.84 114.05,56.75 arc-45 114.14,56.98 114.84,57.68 arc-45 115.07,57.77 118.49,57.77 arc90 119.25,58.53 C32.2 121.5,59.72 arc-90 122.17,59.04 122.17,57.77 arc90 122.81,57.14 v124.08,57.14
  Bottom 0.508: v124.08,57.14 127.57,57.14 arc45 127.79,57.23 1L.D
  pour Bottom (no thermals): 130.68,65.77 arc90 130.56,65.65 130.56,60.31 arc90 130.68,60.19
  pour Top (no thermals): 142.49,57.01 arc-90 145.16,57.01 arc-90 145.16,54.09 arc-90 142.49,54.09 arc-90
  pour Bottom (no thermals): 142.49,57.01 arc-90 145.16,57.01 arc-90 145.16,54.09 arc-90 142.49,54.09 arc-90
  pour Bottom (no thermals): 133.22,65.65 130.56,65.65 130.56,65.14 130.56,60.19 131.32,60.19
  pour Bottom (no thermals): 130.81,65.65 arc90 130.56,65.39 130.56,60.69 arc90 130.94,60.31
  pour Bottom (no thermals): 136.65,68.95 135.76,68.95 arc90 135.51,68.69 135.51,66.03 arc-90 135.13,65.65 130.94,65.65 arc90 130.56,65.27 130.56,60.69 arc90 131.06,60.19 141.1,60.19 arc-90 141.73,59.55 141.73,55.74 arc90 142.24,55.23 145.03,55.23 arc90 145.67,55.87 145.67,68.19 arc90 145.03,68.82
  pour Top (no thermals): 135.13,75.17 133.6,75.17 arc90 133.1,74.66 133.1,72.89 arc90 133.48,72.5 139.19,72.5 arc-90 139.83,71.87 139.83,61.07 arc90 140.72,60.19 141.22,60.19 arc-90 141.73,59.68 141.73,55.74 arc90 142.24,55.23 145.42,55.23 arc90 145.8,55.61 145.8,70.94 arc45 145.05,72.74 144.27,73.52 143.36,74.43 arc45 141.57,75.17 135.38,75.17
  pour Top (no thermals): 140.97,60.19 138.56,60.19 arc-90 138.3,60.44 138.3,71.74 arc90 137.67,72.38 133.48,72.38 arc-90 133.1,72.76 133.1,73.9 arc-90 133.35,74.16 141.35,74.16 arc-90 142.49,73.01 142.49,60.82 arc-90 141.86,60.19
1LO
  pour Bottom (no thermals): 124.59,62.6 124.84,62.6 arc-90 125.09,62.34 125.09,61.96 arc90 125.6,61.46 128.27,61.46 arc-90 128.4,61.33 128.4,60.19 arc-90 128.27,60.06 125.86,60.06 arc90 125.73,59.93 125.73,58.53 arc-90 125.6,58.41 125.09,58.41 arc-90 124.97,58.53 124.97,60.82 arc90 124.59,61.2 124.46,61.2 arc-90 124.21,61.46 124.21,62.47 arc-90 124.33,62.6
2HO
  pour Top (no thermals): 136.27,49.9 136.4,49.9 arc90 136.65,50.15 136.65,52.82 arc90 136.4,53.07 133.99,53.07 arc90 133.86,52.95 133.86,51.68 arc90 133.99,51.55 135.51,51.55 arc-90 135.76,51.3 135.76,50.03 arc90 135.89,49.9
2HS  (via drill 0.6)
  Top 0.508: MD1.18 114.17,46.85 arc45 114.39,46.94 115.98,48.53 arc45 116.08,48.76 116.08,54.09 arc-90 116.55,54.56 C33.1 123.39,55.27 arc-45 123.61,55.36 v124.33,55.36
  Bottom 0.508: D8.C 134.24,52.95 arc-45 134.02,53.04 131.79,55.27 arc45 131.57,55.36 v124.33,55.36
  pour Bottom (no thermals): 130.81,43.8 arc90 131.06,43.55 136.27,43.55 arc90 136.65,43.93 136.65,46.31 arc-45
  pour Top (no thermals): 145.8,53.84 arc-90 148.46,53.84 arc-90 148.46,50.91 arc-90 145.8,50.91 arc-90
  pour Bottom (no thermals): 145.8,53.84 arc-90 148.46,53.84 arc-90 148.46,50.91 arc-90 145.8,50.91 arc-90
  pour Bottom (no thermals): 134.49,49.14 130.94,49.14 arc90 130.68,48.88 130.68,43.8 arc90 130.94,43.55 136.78,43.55
  pour Top (no thermals): 135,58.28 133.86,58.28 arc90 133.1,57.52 133.1,55.87 arc90 133.6,55.36 134.96,55.36 arc-45 136.76,54.62 139.45,51.93 140.23,51.15 arc45 142.02,50.41 147.32,50.41 147.32,53.58 arc90 146.69,54.22 146.66,54.19 arc-45 145.8,53.84 145.52,53.56 arc-45 143.73,52.82 142.75,52.82 137.79,57.78 arc45 136.27,58.41
  pour Bottom (no thermals): 135.64,53.71 135,53.71 arc90 134.75,53.45 134.75,49.39 arc-90 134.49,49.14 131.19,49.14 arc90 130.81,48.76 130.81,43.8 arc90 131.19,43.42 136.27,43.42 arc90 136.91,44.06 136.91,48.37 arc-90 138.94,50.41 147.07,50.41 arc90 147.45,50.79 147.45,53.71 arc90 146.94,54.22 arc45 146.07,53.86 145.67,53.45 arc-45 144.14,52.82 142.62,52.82 138.43,52.82 arc-90 138.18,53.07 138.18,53.33 arc90 137.8,53.71
  pour Top (no thermals): 134.62,58.41 140.46,58.41 arc-90 140.97,57.9 140.97,53.45 arc90 141.48,52.95 143.13,52.95 arc-90 143.64,52.44 143.64,50.66 arc-90 143.38,50.41 138.18,50.41 arc-90 137.8,50.79 137.8,54.47 arc90 136.91,55.36 135.13,55.36 arc-90 134.49,55.99
  pour Top (no thermals): 137.67,51.42 137.67,49.9 arc90 137.92,49.64 147.06,49.64 arc45 147.29,49.74 148.59,51.04 148.59,51.16 arc45 148.5,51.39 146.56,53.33 146.05,53.33 arc45 145.83,53.23 144.27,51.68 140.46,51.68
  pour Bottom (no thermals): 134.75,51.3 134.75,54.85 arc-90 134.87,54.98 140.71,54.98 arc-45 140.94,54.89 142.88,52.95 146.93,52.95 arc-45 147.16,52.85 147.32,52.69 147.32,51.3 arc-45 147.23,51.08 146.81,50.66
  pour Bottom (no thermals): 147.32,52.31 147.32,50.28 arc-90 147.07,50.03 138.56,50.03 arc90 137.16,48.63 136.02,48.63 arc-90 135.51,49.14 135.51,52.18 arc-90 136.02,52.69
2LO
  pour Bottom (no thermals): 127.25,44.82 128.14,44.82 arc-90 128.52,44.44 128.52,43.68 arc-90 128.27,43.42 127.25,43.42 arc90 126.75,42.91 126.75,42.02 arc-90 126.49,41.77 126.11,41.77 arc-90 125.98,41.9 125.98,44.69 arc90 125.73,44.95 124.71,44.95 arc-90 124.46,45.2 124.46,45.71 arc-90 124.59,45.83 126.11,45.83 arc-45 126.33,45.74
3.3V  (via drill 0.6, 0.9)
  Top 0.254: U$1.10 69.1,49.49 arc-45 69.19,49.71 C10.1 | U$1.57 77.33,41.26 arc45 77.78,41.44 78.01,41.68 arc-45 78.24,41.77 79.15,41.77 arc-45 C12.1 | 67.97,31.76 arc45 68.06,31.54 C7.1 | 77.09,51.8 78.99,49.9 arc45 79.21,49.81 R2.1 | C8.1 62.42,40.35 arc45 62.64,40.26 U$1.26 | C15.1 56.9,42.06 | IMU1.13 48.62,13.72 arc45 48.84,13.82 C16.1 | 44.08,11.67 44.08,11.08 arc-45 43.99,10.86 C18.1 | 44.08,11.67 IMU1.8 | IMU1.9 44.58,12.17 arc-90 44.21,11.8 arc90 44.08,11.67 | IMU1.3 39.87,15.22 arc90 39.62,14.97 39.62,13.32 | C7.1 arc-45 68.2,31.58 | U$1.38 68.6,31.98 arc-45 68.51,31.75 C7.1
  Top 0.508: JP4.1 JP5.1 | v155.7,5.58 arc90 153.16,8.12 142.24,8.12 arc90 141.61,7.48 141.61,3.8 arc-90 140.97,3.16 106.05,3.16 arc-90 105.66,3.54 105.66,7.53 arc90 XLED3.CAT 105.57,8.87 arc45 105.66,9.09 105.66,18.76 arc45 105.57,18.98 XLED2.CAT | P1.4 arc90 42.8,34.76 42.8,34.15 arc-90 42.67,34.02 41.4,34.02 | C11.1 C10.1 | 41.4,34.02 arc90 42.16,34.78 42.16,33.64 arc-90 42.29,33.52 42.29,33.13 arc90 41.4,34.02 | C16.1 50.46,14.38 arc90 51.18,15.1 51.18,16.87 arc-45 51.27,17.1 v52.7,18.53 arc90 52.8,18.62 52.8,20.02 arc90 51.89,20.93 R5.2 v45.21,19.42 | 43.79,8.78 C18.1 | 44.2,8.37 arc-90 43.79,8.78 | 44.2,8.37 50.8,8.37 arc90 v51.69,9.26 v51.69,11.93 | 39.62,13.32 39.62,8.75 arc90 40.01,8.37 44.2,8.37 | 43.79,8.78 arc-90 43.38,8.37 | v40.89,18.66 42.45,20.21 arc45 42.55,20.44 R4.2 | 41.4,34.02 arc90 40.64,33.26 40.64,20.57 arc-45 40.55,20.34 33.62,13.41 arc-45 33.4,13.32 16.89,13.32 arc-45 v16.83,13.35 | R17.2 R16.2 79.88,30.85 arc45 79.98,30.63 v80.26,30.34 | v56.52,9.26 56.52,2.65 arc-90 56.13,2.27 50.16,2.27 | 33.15,2.27 25.29,2.27 arc-45 25.07,2.37 JP6.2 | 33.15,2.27 41.53,2.27 | 41.53,2.27 50.16,2.27 | JP7.2 32.02,3.53 arc45 32.11,3.31 33.15,2.27 | JP8.2 40.91,3.02 arc45 41,2.8 41.53,2.27 | JP9.2 49.8,2.77 arc45 49.89,2.54 50.16,2.27 | 84.45,30.34 arc90 84.55,30.25 87.27,30.25 arc-45 87.5,30.15 v87.74,29.92 | 52.7,20.94 arc-90 52.69,20.93 | 52.7,21.9 arc-90 51.74,20.93
  Top 0.61: C24.1 C25.1 66.58,68.91 arc-45 66.81,68.82 66.96,68.66 arc45 67.19,68.57 68.96,68.57 | R12.2 72.9,56.25 arc90 73.53,56.88 73.53,61.84 | R10.2 73.02,61.58 arc45 73.47,61.77 73.53,61.84 | 68.96,68.57 69.6,68.57 | 70.1,68.57 73.28,68.57 arc-90 73.53,68.31 73.53,61.84 | 69.57,67.7 arc45 69.38,68.14 68.96,68.57 | 69.57,67.7 69.57,67.77 | 69.76,68.22 arc45 69.57,67.77 | 70.1,68.57 69.76,68.22 | 69.6,68.57 70.1,68.57 | 69.6,68.57 69.6,68.06 | 69.57,67.7 CS2.14 | 69.76,68.22 arc45 69.57,67.77
  Top 0.762: C8.1 C13.1 57.24,41.43 arc-45 57.02,41.52 C15.1 | 57.32,42.06 56.9,42.06 54.7,42.06 arc-45 54.48,42.16 53.31,43.33 arc-45 53.21,43.55 53.21,46.6 | 53.21,46.6 53.21,47.36 | 53.21,46.6 53.53,46.92 arc-45 53.98,47.1 53.85,47.1 arc-90 53.21,47.74 | 53.21,47.36 53.21,47.74 | 53.21,47.36 arc90 53.34,47.23 arc90 53.59,46.98 53.59,47.1 L1.1 | C24.1 55.08,68.91 arc90 54.23,68.06 54.23,50.28 arc-45 54.14,50.06 53.31,49.23 arc45 53.21,49 53.21,47.74 | C9.1 C12.1 | C14.1 67.57,29.45 arc-45 67.12,29.64 v66.56,30.35 | C14.1 67.88,31.13 arc-90 C7.1 | C20.1 94.06,21.07 arc45 94.28,21.16 XBEE.1 103.22,24.91 arc-45 103.44,24.81 104.43,23.83 arc-45 104.52,23.6 XLED2.CAT arc-45 XLED2.CAT | XLED1.CAT 103.36,6.53 arc-45 103.45,6.75 XLED3.CAT | PROG.VDD 67.09,24.41 arc45 67.18,24.63 67.18,28.18 arc-45 67.28,28.4 67.79,28.91 arc45 67.88,29.14 C14.1
  Top 1.016: C4.1 57.77,33.52 arc45 58.67,33.89 v58.93,34.15 59.69,34.91 arc45 59.94,35.53 59.94,38.85 arc90 59.05,39.74 58.8,39.74 arc-90 C15.1 | C11.1 69.38,52.98 arc-90 70.48,54.09 74.54,54.09 arc-45 74.99,53.9 76.9,51.99 | 77.09,51.8 76.9,51.99 | C9.1 82.97,41.73 arc-45 83.19,41.64 v83.57,41.26 84.71,40.12 84.71,33.77 83.69,32.75 83.69,31.1 84.45,30.34 v80.26,30.34 | v52.7,18.53 52.7,20.94 52.7,21.9 v52.7,22.84 | v77.09,47.87 77.09,51.8 | 77.09,51.8 arc90 76.9,51.99
  Bottom 0.508: JP4.1 154.73,35.37 arc-90 155.58,34.53 155.58,5.7 arc90 v155.7,5.58 | v52.7,18.53 51.78,17.61 arc45 51.69,17.38 v51.69,11.93 | v45.21,19.42 41.79,19.42 arc45 41.56,19.33 v40.89,18.66 | R1.2 v16.83,13.35 | 79.25,30.34 79.25,30.09 | 79.25,30.09 79.88,30.09 | 79.25,30.09 78.61,30.09 | v56.52,9.26 v51.69,9.26 | XBEE.1 arc90 98.07,24.95 98.07,25.74 arc90 97.66,26.15 89.28,26.15 arc-90 88.77,26.66 88.77,28.69 arc45 88.68,28.91 88.2,29.39 v87.74,29.92 | USER1.1 76.97,18.61 arc90 77.67,19.3 77.67,29.08 arc90 76.73,30.09 78.42,30.16 arc-91 78.52,30.15 78.5,30.1 arc90 77.66,29.35 77.66,30.27 arc-90 77.67,30.28 arc-90 77.74,30.34
  Bottom 1.016: v83.57,41.26 78.36,41.26 arc-90 77.09,42.53 v77.09,47.87 | 63,30.34 v66.56,30.35 75.96,30.34 77.74,30.34 79.25,30.34 v80.26,30.34 | 63,30.34 arc-45 62.55,30.53 v58.93,34.15 | v52.7,22.84 arc-45 52.8,23.07 59.98,30.25 arc-45 60.2,30.34 63,30.34
  pour Top (no thermals): 48.26,35.55 49.77,35.55 arc-45 50.22,35.36 51.56,34.02 53.59,34.02 arc45 54.03,34.21 54.1,34.28 55.75,34.28 arc-90 55.88,34.15 55.88,32.88 arc-90 55.75,32.75 54.37,32.75 arc-45 53.92,32.94 53.85,33.01 51.69,33.01 51.57,33.01 arc-45 51.12,33.19 50.16,34.15 48.26,34.15 48.26,35.42
  pour Top (no thermals): 48.26,35.55 45.09,35.55 arc-45 44.65,35.73 43.81,36.56 41.91,36.56 41.91,33.01 43.69,33.01 44.65,33.96 arc-45 45.09,34.15 48.13,34.15
3.3V1  (via drill 0.6)
  Top 0.254: U$2.26 214.71,25.3 arc90 C53.1 | 203.28,27.61 IMU2.8 203.28,27.32 | 203.28,27.61 arc-90 C58.1 arc-90 202.45,26.55 202.45,26.49 | 203.52,27.18 arc90 203.78,27.44 | 203.52,27.18 203.37,27.18 arc-90 203.28,27.27 203.28,27.61 | IMU2.13 208.07,29.23 arc90 C60.1 | 199.43,18.27 arc-90 C56.1 199.85,17.84 arc42 200.06,17.76 U$2.38 | C55.1 217.74,8.95 arc90 217.42,9.27 216.03,9.27 arc-90 215.71,9.59 U$2.57 arc90 U$2.57 | 202.63,26.67 202.45,26.49 | 202.45,26.49 202.37,26.42 | C54.1 223.16,18.76 arc90 222.69,18.29 222.69,17.53 arc-90 222.44,17.27 221.17,17.27 arc90 U$2.10 | 226.08,23.62 C49.1 arc45 226.06,23.69 218.61,23.69 arc45 218.39,23.59 218.3,23.51 arc45 218.21,23.28 U$2.19 | 203.78,27.44 IMU2.9 | 203.52,27.18 arc90 203.78,27.44 | v199.9,30.26 200.27,30.64 arc-45 200.5,30.73 IMU2.3
  Top 0.508: 196.7,18.29 C51.1 arc90 196.62,18.54 187.61,27.55 arc-45 187.52,27.78 v187.52,31.75 | D15.8 198.02,41.27 C69.1 arc90 198.1,41.27 200.72,41.27 arc-90 201.49,40.51 R41.2 R42.2 205.64,37.48 | 207.07,37.48 205.64,37.48 | 213.04,34.04 209.05,37.41 arc40 208.85,37.48 207.07,37.48 | 214.19,33.78 215,34.35 208.8,40.55 arc45 208.58,40.64 v202.76,40.64 | 197.51,18.54 arc-90 197.68,18.38 | 202.63,26.67 202.63,24.89 arc-90 v201.99,24.26 | 207.07,37.48 arc-90 206.31,38.24 | v206.31,39.12 206.31,38.15 arc-90 205.64,37.48 | C49.1 227.39,23.66 arc45 227.61,23.75 v228.79,24.93 | v196.53,34.44 191.05,34.44 arc-45 190.83,34.53 v190.56,34.8 | JP22.2 196.58,0.73 arc45 196.81,0.64 202.62,0.64 arc45 202.85,0.73 v205.8,3.68
  Top 0.762: USER.1 191.89,17.58 arc-90 192.85,18.54 197.51,18.54 | C55.1 C50.1 224.41,8.22 arc90 225.06,8.87 225.06,8.69 arc-90 224.61,8.24 225.34,8.24 arc-90 225.36,8.22 arc90 R34.1 | C43.1 C54.1 227.48,18.76 arc90 v228.79,20.07 | v226.89,35.18 arc-90 226,34.29 219.27,34.29 | 224.85,10.07 arc-90 223,8.22
  Top 1.016: SW1.6 SW1.1 220.48,35.51 arc-90 219.27,34.29 216.6,34.29 | C53.1 C52.1 arc-90 214.06,29.12 C57.1 arc-90 216.6,34.29 | C51.1 197.68,18.38 C56.1 | C60.1 209.4,29.63 213.04,34.04 216.34,34.04 arc90 216.36,34.05 | 213.42,33.78 214.19,33.78 215.2,33.78 215.33,33.91 216.21,33.91 216.36,34.05 | 216.36,34.05 216.6,34.29 | R34.1 arc-90 224.85,10.07 v224.85,13.08 | v228.79,31.37 v228.79,24.93
  Bottom 0.254: v199.9,30.26 arc45 199.88,30.26 199.05,29.43 arc-45 199.08,29.72 198.69,29.84 | 198.92,29.3 arc90 199.07,29.15 199.49,29.15 | 199.49,29.15 arc90 199.68,28.96 200.09,28.96 | 198.69,29.84 | 199.42,29.81 arc-45 198.69,29.84 | 199.42,29.81 199.33,29.59 arc45 199.36,29.5 199.49,29.15 | 199.42,29.81 199.83,30.23
  Bottom 0.508: v206.31,39.12 arc90 206.06,39.37 199.33,39.37 arc90 198.18,38.23 198.18,30.86 arc90 200.09,28.96 200.34,28.96 arc-90 201.99,27.3 v201.99,24.26 | USER.1 194.04,11.81 arc-45 194.14,11.59 194.14,6.24 arc-45 194.04,6.02 190.66,2.63 arc45 190.56,2.41 190.56,1.4 191.83,1.4 | 177.1,1.27 185.99,1.27 | 185.99,1.27 191.71,1.27 | 191.71,1.27 192.23,1.27 | 177.1,1.27 169.5,1.27 arc-45 169.28,1.36 JP21.2 | 177.1,1.27 176.45,1.92 arc-45 176.36,2.15 JP19.2 | 185.99,1.27 185.34,1.92 arc-45 185.25,2.15 JP20.2 | 191.83,1.4 192.23,1.4 arc45 192.45,1.49 JP22.2 | 191.71,1.27 191.83,1.4 | 228.88,25.02 arc90 v228.79,24.93 228.95,24.77 arc-45 229.04,24.55 229.04,24.23 | v202.76,40.64 198.31,40.64 arc90 196.91,39.24 196.91,34.67 arc-90 v196.53,34.44 | v187.52,31.75 v190.56,34.8 | JP29.1 208.71,6.46 arc45 208.49,6.37 v205.8,3.68
  Bottom 1.016: v228.79,24.93 v228.79,20.07 arc90 224.85,16.13 v224.85,13.08 228.57,9.36 arc45 228.8,9.27 232.85,9.27 arc45 233.07,9.36 235.05,11.34 arc-45 235.27,11.43 PROG_1.VDD | v226.89,35.18 arc-90 228.79,33.27 v228.79,31.37
3.3V2  (via drill 0.6)
  Top 0.254: U$3.38 281.01,14.21 arc45 281.1,13.98 282.89,12.19 293.34,12.19 arc-45 293.57,12.1 C77.1 | U$3.10 281.51,30.5 arc45 281.41,30.73 C74.1 | 288.99,30.86 288.99,34.16 arc-45 289.08,34.38 290.64,35.94 291.54,35.94 arc-90 291.86,35.55 291.86,35.94 arc-90 U$34.14 | U$34.14 arc-45 291.85,35.94 | 291.58,35.94 arc90 291.85,36.41 291.85,35.97 arc90 U$34.14 | 250.16,1.49 arc-45 250.39,1.4 | U$3.57 289.11,22.98 arc45 289.33,23.08 290.04,23.78 arc-45 290.26,23.88 294.32,23.88 arc90 294.96,24.51 294.96,25.27 arc-90 295.21,25.53 296.86,25.53 | 296.86,25.53 296.9,25.53 arc90 C76.1 | 296.86,25.53 arc90 296.99,25.65 299.15,25.65 arc-90 299.28,25.53 | U$3.26 273.86,21.98 arc-90 273.62,22.23 273.62,22.9 arc90 C71.1 | U$3.19 275.57,25.48 arc-90 275.15,25.91 275.15,27.05 arc90 274.76,27.43 271.97,27.43 arc-90 271.59,27.81 271.59,29.08 arc90 271.12,29.55 C105.1 arc90 268.25,29.34
  Top 0.406: 250.03,12.61 arc90 250.13,12.7 250.13,12.83
  Top 0.508: R62.2 281.42,1.49 arc-45 281.2,1.4 272.61,1.4 | 254.06,1.4 263.46,1.4 | 263.46,1.4 272.61,1.4 | R61.2 273.88,2.8 arc-45 273.78,2.57 272.61,1.4 | R60.2 264.22,2.29 arc-45 264.13,2.07 263.46,1.4 | R59.2 254.57,2.04 arc-45 254.48,1.81 254.06,1.4 | 250.39,1.4 254.06,1.4 | 250.13,1.52 250.16,1.49 | R45.1 272.9,30.01 arc-45 272.99,30.23 v273.62,30.86 | v308.93,7.49 308.93,3.3 arc90 310.2,2.03 342.07,2.03 arc90 342.96,2.92 XLED6.CAT 342.96,10.03 arc-45 343.05,10.25 343.38,10.57 arc45 343.47,10.8 343.47,21.26 arc45 343.38,21.48 342.96,21.9 arc45 342.87,22.12 XLED7.CAT 342.83,25.53 arc45 342.74,25.75 341.28,27.21 arc45 341.05,27.3 335.65,27.3 arc45 XBEE1.1 | 293.43,9.61 292.85,10.19 arc45 292.63,10.29 v292.16,10.29 | v308.93,11.43 308.93,12.32 arc90 308.29,12.95 302.96,12.95 arc90 302.07,12.06 | 302.07,13.59 arc90 302.7,12.95 | v279.34,32.13 280.9,32.13 arc90 C73.1 | v276.13,12.86 273.9,12.86 arc-45 273.67,12.95 USER2.1 | 268.25,29.34 268.25,29.63 arc45 268.16,29.85 266.7,31.31
  Top 0.762: JP30.VDD 293.43,9.61 arc-90 C72.1 C77.1 | XLED5.CAT 341.31,8.19 arc-45 341.4,8.41 XLED6.CAT | C103.1 331.89,23.75 arc45 332.12,23.84 XBEE1.1 | C73.1 C74.1 | U$5.4 arc90 250.13,30.45 250.13,12.83 | C98.1 264.86,29.59 arc45 265.08,29.69 266.7,31.31 269.3,33.91 v273.62,33.91 | 302.07,24.64 v302.07,21.84 302.07,21.72 | 302.07,24.64 302.07,26.29 | 302.07,26.29 arc90 301.18,27.18 v295.47,27.18 | 250.03,12.61 247.17,9.74 arc45 247.08,9.52 247.08,2.16 arc90 247.71,1.52 250.13,1.52 | C71.1 C104.1 arc-90 271.17,23.24 C78.1 267.01,23.24 arc90 v266.89,23.11 | v302.07,11.56 302.07,12.06 302.07,13.59 v302.07,16.64 | v290.89,28.83 arc45 290.8,29.05 288.99,30.86 | v281.24,7.75 287.46,7.75 arc45 287.68,7.84 v288.23,8.38 | v273.62,18.93 276.03,16.51 arc-45 276.13,16.29 v276.13,12.86 | C76.1 C75.1 | 302.07,26.29 arc-90 301.31,25.53 | 299.28,25.53 301.18,25.53 arc-90 302.07,24.64
  Bottom 0.508: v279.34,32.13 279.34,28.07 arc-90 278.7,27.43 273.88,27.43 arc90 273.62,27.18 | v273.62,18.93 271.84,18.93 arc-45 271.62,19.02 v266.89,23.11 | v308.93,11.43 v308.93,7.49
  Bottom 0.762: v273.62,18.93 273.62,27.18 v273.62,30.86 v273.62,33.91 | v302.07,11.56 arc-90 300.8,10.29 v292.16,10.29 290.13,10.29 v288.23,8.38 | v302.07,16.64 v302.07,21.84 | v295.47,27.18 292.68,27.18 arc-45 292.45,27.27 v290.89,28.83 | v276.13,12.86 v281.24,7.75
  pour Top (no thermals): 249.87,32.26 251.14,32.26 arc90 252.16,31.24 255.71,31.24 257.11,31.24 arc-90 257.37,30.99 257.37,30.35 arc-90 257.11,30.1 252.29,30.1 arc90 251.14,28.96 249.75,28.96 arc90 249.62,28.83
  pour Top (no thermals): 256.6,31.37 257.62,31.37 arc-45 257.84,31.28 259.14,29.97 261.17,29.97 arc45 261.4,30.06 261.68,30.35 263.21,30.35 arc-90 263.46,30.1 263.46,29.08 arc-90 263.21,28.83 261.94,28.83 arc-45 261.72,28.92 261.56,29.08 258.77,29.08 arc-45 258.54,29.18 257.75,29.97 256.22,29.97 arc-90 256.1,30.1 256.1,31.24 arc-90 256.22,31.37
3HO
  pour Top (no thermals): 135.13,36.56 136.27,36.56 arc-90 136.53,36.31 136.53,35.29 arc-90 136.4,35.17 136.14,35.17 arc90 136.02,35.04 136.02,32.88 arc-90 135.89,32.75 135.13,32.75 arc-90 135,32.88 135,34.91 arc90 134.75,35.17 133.99,35.17 arc-90 133.73,35.42 133.73,36.44 arc-90 133.86,36.56
3HS  (via drill 0.6)
  Top 0.508: MD1.15 113.15,43.04 arc-45 113.38,42.95 115.22,41.1 arc45 115.45,41.01 119.76,41.01 arc-90 120.02,40.75 120.02,39.83 arc90 C34.1 123.69,39.74 arc-45 123.92,39.64 v124.33,39.23
  Bottom 0.508: D6.C 132.29,39.14 arc45 132.07,39.23 v124.33,39.23
  pour Bottom (no thermals): 148.97,50.53 arc-90 151.64,50.53 arc-90 151.64,47.61 arc-90 148.97,47.61 arc-90
  pour Top (no thermals): 148.97,50.53 arc-90 151.64,50.53 arc-90 151.64,47.61 arc-90 148.97,47.61 arc-90
  pour Bottom (no thermals): 132.21,31.74 130.18,31.36 130.18,26.53 arc90 130.43,26.28
  pour Bottom (no thermals): 130.05,26.66 arc90 130.56,26.15
  pour Bottom (no thermals): 136.78,35.55 136.4,35.55 arc90 136.02,35.17 136.02,32.37 arc-90 135.51,31.86 130.3,31.86 arc90 130.05,31.61 130.05,26.53 arc90 130.56,26.02 140.08,26.02 arc90 141.1,27.04 141.1,41.52 arc-90 144.15,44.56 151.13,44.56 arc90 152.15,45.58 152.15,49.14 arc90 151.77,49.52 148.72,49.52 arc90 148.46,49.26 148.46,48.37 arc-90 148.08,47.99 139.19,47.99 arc90 138.05,46.85 138.05,35.8 arc-90 137.67,35.42
  pour Top (no thermals): 135.13,41.77 133.99,41.77 arc90 133.35,41.14 133.35,39.36 arc90 133.86,38.85 139.95,38.85 arc90 140.72,39.61 140.72,41.01 arc-90 144.27,44.56 150.88,44.56 arc90 152.15,45.83 152.15,49.26 arc90 152.02,49.39 148.84,49.39 arc90 148.34,48.88 148.34,48.37 arc-90 147.83,47.87 139.32,47.87 arc90 137.92,46.47 137.92,42.28 arc-90 137.41,41.77
  pour Top (no thermals): 133.35,40.63 133.35,42.91 arc-90 133.73,43.29 136.78,43.29 arc90 137.03,43.55 137.03,47.23 arc-90 137.54,47.74 139.07,47.74 arc-90 139.83,46.98 139.83,39.36 arc-90 139.45,38.98 133.73,38.98 arc-90 133.35,39.36
  pour Top (no thermals): 137.03,45.83 137.03,48.5 arc-90 137.29,48.76 150.24,48.76 arc-90 151,47.99 151,46.22 arc-90 150.62,45.83 138.94,45.83 arc90 138.18,45.07
  pour Bottom (no thermals): 138.05,45.2 138.05,48.63 arc-90 138.81,49.39 150.37,49.39 arc-90 151.38,48.37 151.38,45.58 arc-90 151.13,45.33 151.13,45.2 150.24,45.2
3LO
  pour Bottom (no thermals): 126.62,27.42 127.89,27.42 arc-90 128.14,27.17 128.14,26.28 arc-90 127.89,26.02 124.97,26.02 arc90 124.71,25.77 124.71,24.88 arc-90 124.46,24.63 123.95,24.63 arc-90 123.83,24.75 123.83,27.55 arc90 123.7,27.67 123.7,28.31 124.46,28.31 arc-90 124.59,28.18 arc90 125.35,27.42
5V
  Top 0.508: JP25.3 236.78,44.72 arc-90 238.32,43.18 | 238.32,44.72 238.32,43.18 | 238.32,45.72 238.32,44.72 | 238.32,44.72 JP25.3 | 238.32,43.18 238.32,36.61 arc-90 R36.2
  Top 0.61: JP25.3 237.32,44.72 arc90 238.32,45.72 238.32,49.53 arc90 237.05,50.8 229.3,50.8 arc90 C45.1
  Top 1.016: 221.59,48.48 C46.+ 226.87,48.48 arc45 227.04,48.55 C45.1
  Top 1.27: 220.76,48.03 220,48.03 218.88,49.15 | 220.76,48.03 P4.3 | 220.76,48.03 220.35,48.45 220.37,48.48 221.59,48.48
  Top 2.54: P3.7 208.97,46.99 arc45 209.2,47.08 212.82,50.71 arc-45 213.05,50.8 217.86,50.8 arc-45 218.09,50.71 220.35,48.45
  Bottom 0.508: JP24.3 178.36,36.56 arc90 179.9,38.1 179.9,50.8 arc-90 181.17,52.07 196.27,52.07 arc-45 196.5,51.98 P3.7
5V1  (via drill 0.6)
  Top 0.508: C38.1 19.79,27.97 arc90 U$61.8 v22.23,28.44 | C29.1 arc90 93.76,52.43 93.76,50.82 arc-90 93.34,50.02 U$46.16 93.47,50.02 arc90 93.76,50.31 93.76,50.75 arc90 94.23,50.02 | v74.04,72.38 93.83,72.38 arc-45 94.06,72.28 100.07,66.27 | C27.1 arc45 102.87,71.39 U$47.4
  Top 1.016: C29.1 94.15,57.8 arc-45 94.33,58.25 99.64,63.55 arc45 99.82,64 99.82,66.03 100.07,66.27 arc-45 100.52,66.46 U$47.4
  Bottom 0.508: v74.04,72.38 53.98,72.38 arc90 52.58,70.98 52.58,64.89 arc-45 52.48,64.66 47.72,59.9 arc-45 47.49,59.8 30.23,59.8 arc45 30.01,59.71 16.6,46.31 arc45 16.51,46.08 16.51,43.17 arc90 17.65,42.02 21.84,42.02 arc-90 22.86,41.01 22.86,29.07 arc-90 v22.23,28.44
5V2  (via drill 0.6, 1.1)
  Top 0.508: 5.33,23.74 arc90 6.08,22.99 | 5.33,23.74 5.33,27.8 arc-90 5.97,28.44 14.35,28.44 arc-90 14.99,27.8 14.99,26.4 arc90 15.62,25.77 30.48,25.77 arc90 30.99,26.28 30.99,30.21 | 30.99,30.21 30.99,30.72 | 30.99,31.23 30.99,38.09 arc-90 31.62,38.72 48.51,38.72 48.51,39.61 arc-90 47.63,38.72 47.5,38.72 arc-90 P1.3 | U$61.3 29.12,30.98 arc-90 C37.1 | U$61.1 28.96,28.44 arc90 29.34,28.82 C37.1 | 30.99,30.21 arc90 30.48,30.72 arc90 30.99,31.23 | 30.99,30.72 30.99,31.23 | 30.99,30.72 arc90 30.95,30.76 C37.1 | R15.2 150.11,13.2 arc-90 v150.75,12.56 | v150.75,12.56 arc-90 150.11,11.93 | J5.5 153.7,10.56 arc90 153.42,10.27 153.42,9.51 arc-90 153.04,9.13 v150.75,9.13 R13.2 | 150.11,11.93 R14.2 | v150.75,12.56 arc-90 150.11,11.93 | v86.74,50.02 U$46.1 | v86.23,40.25 86.23,39.02 arc45 86.33,38.8 C30.1 | R23.2 5.75,17.35 arc-90 5.33,17.77 5.33,22.47 | 5.33,22.47 5.33,23.74 | 6.08,22.99 5.86,22.99 arc90 5.33,22.47 | 6.08,22.99 J2.2
  Top 0.762: v150.49,15.73 R22.2
  Top 1.016: 86.53,37.12 C30.1 | 86.53,37.12 arc-45 86.34,36.67 86.34,32.48 v85.6,31.74 | 86.53,37.12 86.53,36.4 arc90 87.38,35.55 92.96,35.55 arc-45 93.18,35.45 95.67,32.97 arc45 95.89,32.88 111.38,32.88 arc-90 112.39,31.86 112.39,22.34 arc90 114.94,19.8 135.13,19.8 arc-90 v135.26,19.67 arc45 134.95,19.8
  Top 1.524: C5.1 55.66,38.31 arc45 55.89,38.21 v57.4,38.21
  Bottom 0.508: v150.75,12.56 v150.75,9.13 | v86.74,50.02 87.03,49.74 arc-45 87.12,49.51 87.12,41.27 arc-45 87.03,41.04 v86.23,40.25
  Bottom 0.762: v150.49,15.73 150.38,15.73 arc45 149.93,15.55 146.94,12.56